# Altium PCB LED.PcbDoc (part 2 of 2)
Units mil, origin at the board's own origin, x right, y up, seen from the top; angles counter-clockwise.
Board outline 7000 x 7000 mil, 2 copper layers (Top Layer, Bottom Layer); 226 components, 111 nets, 676 pads, 222 vias.
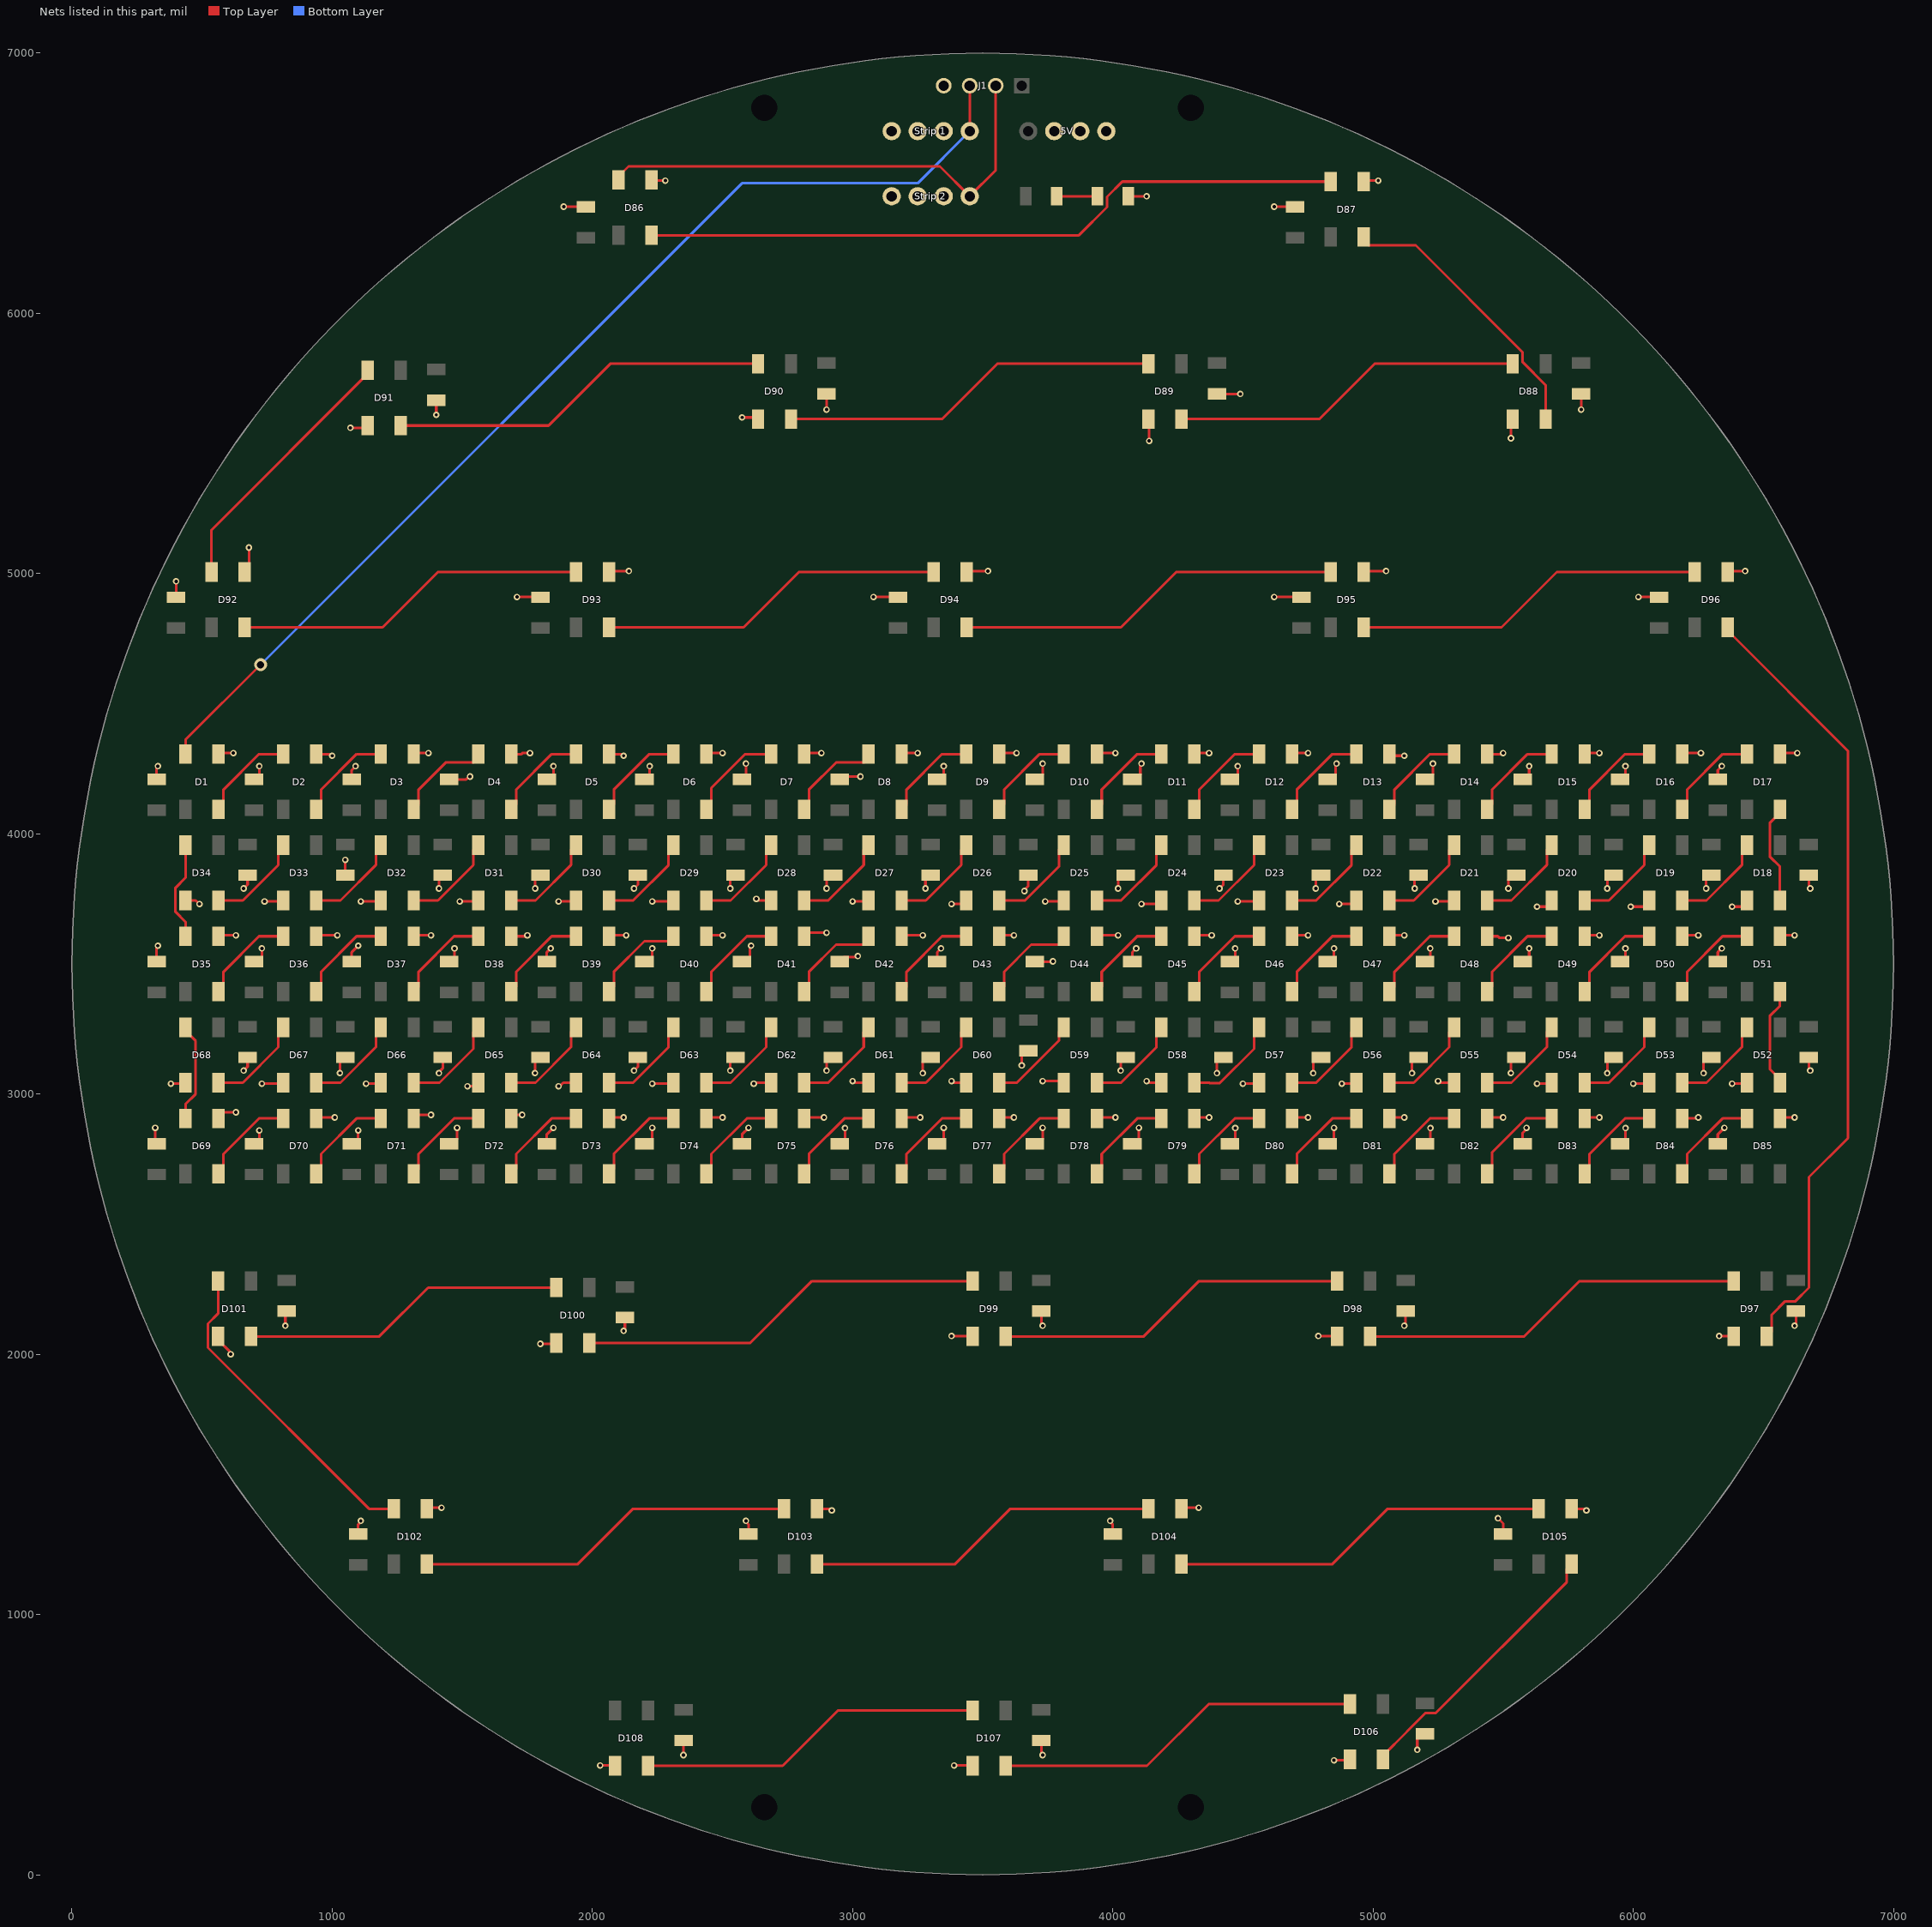
[diagram p2: the nets of this part, all layers, seen from the top]

## Via types
v1: diameter 25, hole 13, Top Layer to Bottom Layer, 217 vias
v2: diameter 59.06, hole 59.06, Top Layer to Bottom Layer, 4 vias
v3: diameter 50, hole 28, Top Layer to Bottom Layer, 1 vias

## Nets (pads, with @x,y where several pads share a name; then routed paths per layer and width w, separated by ;. In a path a pad name is that pad's centre, name@x,y a point inside that pad or via, vN(x,y) a via of type N, cw(c..) or ccw(c..) an arc to the next point about the centre after c; other vN are vias at no path point) (continued)
GND: 5V.2 "Strip 1.2" "Strip 2.2" C1.1 C2.1 C3.1 C4.1 C5.1 C6.1 C7.1 C8.1 C9.1 C10.1 C11.1 C12.1 C13.1 C14.1 C15.1 C16.1 C17.1 C18.1 C19.1 C20.1 C21.1 C22.1 C23.1 C24.1 C25.1 C26.1 C27.1 C28.1 C29.1 C30.1 C31.1 C32.1 C33.1 C34.1 C35.1 C36.1 C37.1 C38.1 C39.1 C40.1 C41.1 C42.1 C43.1 C44.1 C45.1 C46.1 C47.1 C48.1 C49.1 C50.1 C51.1 C52.1 C53.1 C54.1 C55.1 C56.1 C57.1 C58.1 C59.1 C60.1 C61.1 C62.1 C63.1 C64.1 C65.1 C66.1 C67.1 C68.1 C69.1 C70.1 C71.1 C72.1 C73.1 C74.1 C75.1 C76.1 C77.1 C78.1 C79.1 C80.1 C81.1 C82.1 C83.1 C84.1 C85.1 C86.1 C87.1 C88.1 C89.1 C90.1 C91.1 C92.1 C93.1 C94.1 C95.1 C96.1 C97.1 C98.1 C99.1 C100.1 C101.1 C102.1 C103.1 C104.1 C105.1 C106.1 C107.1 C108.1 D1.3 D2.3 D3.3 D4.3 D5.3 D6.3 D7.3 D8.3 D9.3 D10.3 D11.3 D12.3 D13.3 D14.3 D15.3 D16.3 D17.3 D18.3 D19.3 D20.3 D21.3 D22.3 D23.3 D24.3 D25.3 D26.3 D27.3 D28.3 D29.3 D30.3 D31.3 D32.3 D33.3 D34.3 D35.3 D36.3 D37.3 D38.3 D39.3 D40.3 D41.3 D42.3 D43.3 D44.3 D45.3 D46.3 D47.3 D48.3 D49.3 D50.3 D51.3 D52.3 D53.3 D54.3 D55.3 D56.3 D57.3 D58.3 D59.3 D60.3 D61.3 D62.3 D63.3 D64.3 D65.3 D66.3 D67.3 D68.3 D69.3 D70.3 D71.3 D72.3 D73.3 D74.3 D75.3 D76.3 D77.3 D78.3 D79.3 D80.3 D81.3 D82.3 D83.3 D84.3 D85.3 D86.3 D87.3 D88.3 D89.3 D90.3 D91.3 D92.3 D93.3 D94.3 D95.3 D96.3 D97.3 D98.3 D99.3 D100.3 D101.3 D102.3 D103.3 D104.3 D105.3 D106.3 D107.3 D108.3 J1.04 LED1.2 | length 14720.2
  Top Layer w10: v1(320,2870) 320,2814 C69.1@325,2809 ; C35.1@325,3509 325,3560.94 330,3565.94 v1(330,3570) ; C1.1@325,4209 325,4250.94 330,4255.94 v1(330,4260) ; v1(380,3040) 432.8,3040 D68.3@436.5,3043.7 ; C92.1@400,4909 v1(400,4970) ; D34.3@436.5,3743.7 475.25,3743.7 488.95,3730 v1(490,3730) ; D101.3@561.5,2068.7 561.5,2055.05 607.13,2009.42 607.13,2002.87 v1(610,2000) ; D69.3@563.5,2906.3 563.5,2911.25 582.25,2930 v1(630,2930) ; D35.3@563.5,3606.3 567.2,3610 v1(630,3610) ; D1.3@563.5,4306.3 567.2,4310 v1(620,4310) ; v1(660,3090) 675,3105 C68.1@675,3141 ; v1(660,3790) 675,3805 C34.1@675,3841 ; D92.3@663.5,5006.3 680,5022.8 v1(680,5100) ; C70.1@700,2809 703,2809 720,2826 v1(720,2860) ; C36.1@700,3509 713,3509 730,3526 v1(730,3560) ; C2.1@700,4209 703,4209 720,4226 v1(720,4260) ; v1(730,3040) 807.8,3040 D67.3@811.5,3043.7 ; v1(740,3740) 807.8,3740 D33.3@811.5,3743.7 ; v1(820,2110) 820,2161 C101.1@825,2166 ; D70.3@938.5,2906.3 942.2,2910 v1(1010,2910) ; D36.3@938.5,3606.3 942.2,3610 v1(1020,3610) ; D2.3@938.5,4306.3 989.64,4306.3 995.94,4300 v1(1000,4300) ; v1(1029.41,3080.59) 1029.41,3124 1046.41,3141 C67.1@1050,3141 ; C33.1@1050,3841 v1(1050,3900) ; v1(1070,5560) 1127.8,5560 D91.3@1136.5,5568.7 ; C71.1@1075,2809 1083,2809 1100,2826 v1(1100,2860) ; C37.1@1075,3509 1075,3545 v1(1100,3570) ; C3.1@1075,4209 1075,4245 v1(1090,4260) ; C102.1@1100,1309 1100,1346 1110,1356 v1(1110,1360) ; v1(1110,3740) 1182.8,3740 D32.3@1186.5,3743.7 ; v1(1130,3040) 1182.8,3040 D66.3@1186.5,3043.7 ; D71.3@1313.5,2906.3 1327.2,2920 v1(1380,2920) ; D37.3@1313.5,3606.3 1317.2,3610 v1(1380,3610) ; D3.3@1313.5,4306.3 1317.2,4310 v1(1370,4310) ; D102.3@1363.5,1406.3 1367.2,1410 v1(1420,1410) ; v1(1400,5610) C91.1@1400,5666 ; v1(1410,3080) 1410,3084.06 1425,3099.06 C66.1@1425,3141 ; v1(1410,3790) 1410,3826 C32.1@1425,3841 ; C72.1@1450,2809 1463,2809 1480,2826 v1(1480,2870) ; C38.1@1450,3509 1453,3509 1470,3526 v1(1470,3560) ; C4.1@1450,4209 1514.94,4209 1525.94,4220 v1(1530,4220) ; v1(1490,3740) 1557.8,3740 D31.3@1561.5,3743.7 ; v1(1520,3030) 1547.8,3030 D65.3@1561.5,3043.7 ; D72.3@1688.5,2906.3 1702.2,2920 v1(1730,2920) ; D38.3@1688.5,3606.3 1742.24,3606.3 1745.94,3610 v1(1750,3610) ; D4.3@1688.5,4306.3 1727.5,4306.3 1731.2,4310 v1(1760,4310) ; v1(1710,4910) 1799,4910 C93.1@1800,4909 ; v1(1779.41,3080.59) 1779.41,3124 1796.41,3141 C65.1@1800,3141 ; v1(1780,3790) 1780,3824 1797,3841 C31.1@1800,3841 ; v1(1800,2040) 1857.8,2040 D100.3@1861.5,2043.7 ; C73.1@1825,2809 1825,2845 v1(1850,2870) ; C39.1@1825,3509 1825,3545 v1(1840,3560) ; C5.1@1825,4209 1833,4209 1850,4226 v1(1850,4260) ; v1(1870,3030) 1874.06,3030 1887.76,3043.7 D64.3@1936.5,3043.7 ; v1(1870,3740) 1932.8,3740 D30.3@1936.5,3743.7 ; v1(1890,6410) 1974,6410 C86.1@1975,6409 ; v1(2030,420) 2085.2,420 D108.3@2086.5,418.7 ; D73.3@2063.5,2906.3 2067.2,2910 v1(2120,2910) ; D39.3@2063.5,3606.3 2067.2,3610 v1(2130,3610) ; D5.3@2063.5,4306.3 2109.64,4306.3 2115.94,4300 v1(2120,4300) ; D93.3@2063.5,5006.3 2067.2,5010 v1(2140,5010) ; v1(2120,2090) 2120,2094.06 2125,2099.06 C100.1@2125,2141 ; v1(2160,3090) 2175,3105 C64.1@2175,3141 ; v1(2160,3790) 2175,3805 C30.1@2175,3841 ; C74.1@2200,2809 2213,2809 2230,2826 v1(2230,2870) v1@2230.5,2870.5 ; C40.1@2200,3509 2213,3509 2230,3526 v1(2230,3560) ; C6.1@2200,4209 2203,4209 2220,4226 v1(2220,4260) ; D86.3@2227,6512.6 2229.6,6510 v1(2280,6510) ; v1(2230,3040) 2307.8,3040 D63.3@2311.5,3043.7 ; v1(2230,3740) 2307.8,3740 D29.3@2311.5,3743.7 ; v1(2350,460) C108.1@2350,516 ; D74.3@2438.5,2906.3 2442.2,2910 v1(2500,2910) ; D40.3@2438.5,3606.3 2442.2,3610 v1(2500,3610) ; D6.3@2438.5,4306.3 2442.2,4310 v1(2500,4310) ; v1(2530,3090) 2530,3124 2547,3141 C63.1@2550,3141 ; v1(2530,3790) 2530,3824 2547,3841 C29.1@2550,3841 ; C75.1@2575,2809 2575,2845 v1(2600,2870) ; C41.1@2575,3509 2588.5,3509 2605.5,3526 2605.5,3561.44 2610,3565.94 v1(2610,3570) ; C7.1@2575,4209 2590,4224 v1(2590,4270) ; v1(2575,5600) 2630.2,5600 D90.3@2636.5,5593.7 ; v1(2590,1360) 2590,1356 2600,1346 C103.1@2600,1309 ; v1(2620,3040) 2624.06,3040 2627.76,3043.7 D62.3@2686.5,3043.7 ; v1(2630,3750) 2634.06,3750 2640.36,3743.7 D28.3@2686.5,3743.7 ; D75.3@2813.5,2906.3 2817.2,2910 v1(2890,2910) ; D41.3@2813.5,3606.3 2827.2,3620 v1(2900,3620) ; D7.3@2813.5,4306.3 2817.2,4310 v1(2880,4310) ; D103.3@2863.5,1406.3 2909.64,1406.3 2915.94,1400 v1(2920,1400) ; v1(2900,3090) 2900,3124 2917,3141 C62.1@2925,3141 ; v1(2900,3790) 2900,3824 2917,3841 C28.1@2925,3841 ; v1(2900,5630) C90.1@2900,5691 ; C76.1@2950,2809 2953.59,2809 2970.59,2826 v1(2970.59,2869.41) ; C42.1@2950,3509 2967,3526 3011.94,3526 3015.94,3530 v1(3020,3530) ; C8.1@2950,4209 2961,4220 v1(3030,4220) ; v1(3000,3050) 3004.06,3050 3010.36,3043.7 D61.3@3061.5,3043.7 ; v1(3000,3740) 3057.8,3740 D27.3@3061.5,3743.7 ; v1(3080,4910) 3174,4910 C94.1@3175,4909 ; D76.3@3188.5,2906.3 3192.2,2910 v1(3260,2910) ; D42.3@3188.5,3606.3 3192.2,3610 v1(3270,3610) ; D8.3@3188.5,4306.3 3192.2,4310 v1(3250,4310) ; v1(3270,3080) 3270,3124 3287,3141 C61.1@3300,3141 ; v1(3280,3790) 3280,3824 3297,3841 C27.1@3300,3841 ; C77.1@3325,2809 3333,2809 3350,2826 v1(3350,2870) ; C43.1@3325,3509 3325,3545 v1(3340,3560) ; C9.1@3325,4209 3333,4209 3350,4226 v1(3350,4260) ; v1(3380,2070) 3460.2,2070 D99.3@3461.5,2068.7 ; v1(3380,3050) 3384.06,3050 3390.36,3043.7 D60.3@3436.5,3043.7 ; v1(3380,3730) 3422.8,3730 D26.3@3436.5,3743.7 ; v1(3390,420) 3460.2,420 D107.3@3461.5,418.7 ; D94.3@3438.5,5006.3 3442.2,5010 v1(3520,5010) ; D77.3@3563.5,2906.3 3567.2,2910 v1(3620,2910) ; D43.3@3563.5,3606.3 3567.2,3610 v1(3620,3610) ; D9.3@3563.5,4306.3 3567.2,4310 v1(3630,4310) ; v1(3650,3110) 3650,3149 3667,3166 C60.1@3675,3166 ; v1(3660,3780) 3660,3784.06 3675,3799.06 C26.1@3675,3841 ; C78.1@3700,2809 3703,2809 3720,2826 3730,2826 v1(3730,2870) ; C44.1@3700,3509 3769,3509 v1(3770,3510) ; C10.1@3700,4209 3713,4209 3730,4226 v1(3730,4270) ; C107.1@3725,516 3725,469.06 3730,464.06 v1(3730,460) ; C99.1@3725,2166 3725,2119.06 3730,2114.06 v1(3730,2110) ; v1(3730,3050) 3805.2,3050 D59.3@3811.5,3043.7 ; v1(3740,3740) 3807.8,3740 D25.3@3811.5,3743.7 ; D78.3@3938.5,2906.3 3942.2,2910 v1(4010,2910) ; D44.3@3938.5,3606.3 3942.2,3610 v1(4020,3610) ; D10.3@3938.5,4306.3 3942.2,4310 v1(4010,4310) ; v1(3990,1360) 3990,1356 4000,1346 C104.1@4000,1309 ; v1(4020,3790) 4020,3824 4037,3841 C25.1@4050,3841 ; v1(4030,3090) 4030,3124 4047,3141 C59.1@4050,3141 ; LED1.2@4059,6450 v1(4130,6450) ; C79.1@4075,2809 4083,2809 4100,2826 v1(4100,2870) ; C45.1@4075,3509 4075,3545 v1(4090,3560) ; C11.1@4075,4209 4088.5,4209 4105.5,4226 4105.5,4261.44 4110,4265.94 v1(4110,4270) ; v1(4110,3730) 4172.8,3730 D24.3@4186.5,3743.7 ; v1(4130,3050) 4134.06,3050 4140.36,3043.7 D58.3@4186.5,3043.7 ; D89.3@4136.5,5593.7 4140,5590.2 v1(4140,5510) ; D104.3@4263.5,1406.3 4267.2,1410 v1(4330,1410) ; D79.3@4313.5,2906.3 4317.2,2910 v1(4370,2910) ; D45.3@4313.5,3606.3 4317.2,3610 v1(4380,3610) ; D11.3@4313.5,4306.3 4317.2,4310 v1(4370,4310) ; v1(4400,3080) 4400,3124 4417,3141 C58.1@4425,3141 ; C89.1@4400,5691 4401,5690 v1(4490,5690) ; v1(4410,3790) 4425,3805 C24.1@4425,3841 ; C80.1@4450,2809 4453.59,2809 4470.59,2826 v1(4470.59,2869.41) ; C46.1@4450,3509 4453,3509 4470,3526 v1(4470,3560) ; C12.1@4450,4209 4463,4209 4480,4226 v1(4480,4260) ; v1(4480,3740) 4557.8,3740 D23.3@4561.5,3743.7 ; v1(4500,3040) 4557.8,3040 D57.3@4561.5,3043.7 ; v1(4620,4910) 4724,4910 C95.1@4725,4909 ; v1(4620,6410) 4699,6410 C87.1@4700,6409 ; D80.3@4688.5,2906.3 4692.2,2910 v1(4750,2910) ; D46.3@4688.5,3606.3 4692.2,3610 v1(4750,3610) ; D12.3@4688.5,4306.3 4692.2,4310 v1(4750,4310) ; v1(4770,3080) 4770,3124 4787,3141 C57.1@4800,3141 ; v1(4780,3790) 4780,3824 4797,3841 C23.1@4800,3841 ; v1(4790,2070) 4860.2,2070 D98.3@4861.5,2068.7 ; C81.1@4825,2809 4833,2809 4850,2826 v1(4850,2870) ; C47.1@4825,3509 4833,3509 4850,3526 v1(4850,3560) ; C13.1@4825,4209 4838.5,4209 4855.5,4226 4855.5,4261.44 4860,4265.94 v1(4860,4270) ; v1(4850,440) 4907.8,440 D106.3@4911.5,443.7 ; v1(4870,3730) 4922.8,3730 D22.3@4936.5,3743.7 ; v1(4880,3040) 4932.8,3040 D56.3@4936.5,3043.7 ; D95.3@4963.5,5006.3 4967.2,5010 v1(5050,5010) ; D87.3@4963.5,6506.3 4967.2,6510 v1(5020,6510) ; D81.3@5063.5,2906.3 5067.2,2910 v1(5120,2910) ; D47.3@5063.5,3606.3 5067.2,3610 v1(5120,3610) ; D13.3@5063.5,4306.3 5069.8,4300 v1(5120,4300) ; v1(5120,2110) 5120,2114.06 5125,2119.06 C98.1@5125,2166 ; v1(5150,3080) 5150,3124 5167,3141 C56.1@5175,3141 ; v1(5160,3790) 5160,3826 C22.1@5175,3841 ; v1(5170,480) 5170,524 5187,541 C106.1@5200,541 ; C82.1@5200,2809 5203.59,2809 5220.59,2826 v1(5220.59,2869.41) ; C48.1@5200,3509 5203,3509 5220,3526 v1(5220,3560) ; C14.1@5200,4209 5213,4209 5230,4226 v1(5230,4270) ; v1(5240,3740) 5307.8,3740 D21.3@5311.5,3743.7 ; v1(5250,3050) 5254.06,3050 5260.36,3043.7 D55.3@5311.5,3043.7 ; D82.3@5438.5,2906.3 5442.2,2910 v1(5500,2910) ; D48.3@5438.5,3606.3 5479.64,3606.3 5485.94,3600 v1(5520,3600) ; D14.3@5438.5,4306.3 5492.24,4306.3 5495.94,4310 v1(5500,4310) ; v1(5480,1370) 5500,1350 C105.1@5500,1309 ; v1(5520,3790) 5520,3824 5537,3841 C21.1@5550,3841 ; v1(5529.41,3080.59) 5529.41,3124 5546.41,3141 C55.1@5550,3141 ; v1(5530,5520) 5530,5587.2 D88.3@5536.5,5593.7 ; C83.1@5575,2809 5575,2850.94 5590,2865.94 v1(5590,2870) ; C49.1@5575,3509 5583,3509 5600,3526 v1(5600,3560) ; C15.1@5575,4209 5583,4209 5600,4226 v1(5600,4260) ; v1(5630,3040) 5682.8,3040 D54.3@5686.5,3043.7 ; v1(5630,3720) 5667.75,3720 5686.5,3738.75 D20.3@5686.5,3743.7 ; D105.3@5763.5,1406.3 5809.64,1406.3 5815.94,1400 v1(5820,1400) ; v1(5800,5630) C88.1@5800,5691 ; D83.3@5813.5,2906.3 5817.2,2910 v1(5870,2910) ; D49.3@5813.5,3606.3 5817.2,3610 v1(5870,3610) ; D15.3@5813.5,4306.3 5817.2,4310 v1(5870,4310) ; v1(5900,3080) 5900,3124 5917,3141 C54.1@5925,3141 ; v1(5900,3790) 5900,3824 5917,3841 C20.1@5925,3841 ; C84.1@5950,2809 5953.59,2809 5970.59,2826 v1(5970.59,2869.41) ; C50.1@5950,3509 5953,3509 5970,3526 v1(5970,3560) ; C16.1@5950,4209 5953,4209 5970,4226 v1(5970,4260) ; v1(5990,3720) 6042.75,3720 6061.5,3738.75 D19.3@6061.5,3743.7 ; v1(6000,3040) 6057.8,3040 D53.3@6061.5,3043.7 ; v1(6020,4910) 6099,4910 C96.1@6100,4909 ; D84.3@6188.5,2906.3 6242.24,2906.3 6245.94,2910 v1(6250,2910) ; D50.3@6188.5,3606.3 6192.2,3610 v1(6250,3610) ; D16.3@6188.5,4306.3 6192.2,4310 v1(6260,4310) ; v1(6270,3080) 6270,3124 6287,3141 C53.1@6300,3141 ; v1(6280,3790) 6280,3824 6297,3841 C19.1@6300,3841 ; C85.1@6325,2809 6325,2845 v1(6350,2870) ; C51.1@6325,3509 6325,3545 v1(6340,3560) ; C17.1@6325,4209 6325,4245 v1(6340,4260) ; v1(6330,2070) 6385.2,2070 D97.3@6386.5,2068.7 ; D96.3@6363.5,5006.3 6367.2,5010 v1(6430,5010) ; v1(6380,3040) 6432.8,3040 D52.3@6436.5,3043.7 ; v1(6380,3720) 6417.75,3720 6436.5,3738.75 D18.3@6436.5,3743.7 ; D85.3@6563.5,2906.3 6567.2,2910 v1(6620,2910) ; D51.3@6563.5,3606.3 6567.2,3610 v1(6620,3610) ; D17.3@6563.5,4306.3 6567.2,4310 v1(6630,4310) ; v1(6620,2110) 6620,2114.06 6625,2119.06 C97.1@6625,2166 ; C52.1@6675,3141 6675,3099.06 6680,3094.06 v1(6680,3090) ; C18.1@6675,3841 6675,3799.06 6680,3794.06 v1(6680,3790)
NetD1_2: D1.2 D2.4 | length 369.8
  Top Layer w10: D1.2@563.5,4093.7 582.25,4112.45 582.25,4169.96 718.59,4306.3 D2.4@811.5,4306.3
NetD1_4: "Strip 1.1" D1.4 J1.03 | length 4212.3
  Top Layer w10: D1.4@436.5,4306.3 436.5,4361.5 v3(725,4650) ; 3450,6700 J1.03@3450,6875
  Bottom Layer w10: v3(725,4650) 2575,6500 3250,6500 3450,6700
NetD2_2: D2.2 D3.4 | length 369.8
  Top Layer w10: D2.2@938.5,4093.7 957.25,4112.45 957.25,4169.96 1093.59,4306.3 D3.4@1186.5,4306.3
NetD3_2: D3.2 D4.4 | length 377.7
  Top Layer w10: D3.2@1313.5,4093.7 1332.25,4112.45 1332.25,4169.96 1436.19,4273.9 1542.75,4273.9 1561.5,4292.65 D4.4@1561.5,4306.3
NetD4_2: D4.2 D5.4 | length 369.8
  Top Layer w10: D4.2@1688.5,4093.7 1707.25,4112.45 1707.25,4169.96 1843.59,4306.3 D5.4@1936.5,4306.3
NetD5_2: D5.2 D6.4 | length 369.8
  Top Layer w10: D5.2@2063.5,4093.7 2082.25,4112.45 2082.25,4169.96 2218.59,4306.3 D6.4@2311.5,4306.3
NetD6_2: D6.2 D7.4 | length 373.4
  Top Layer w10: D6.2@2438.5,4093.7 2457.25,4112.45 2457.25,4176.14 2587.41,4306.3 D7.4@2686.5,4306.3
NetD7_2: D7.2 D8.4 | length 377.7
  Top Layer w10: D7.2@2813.5,4093.7 2832.25,4112.45 2832.25,4169.96 2936.19,4273.9 3042.75,4273.9 3061.5,4292.65 D8.4@3061.5,4306.3
NetD8_2: D8.2 D9.4 | length 369.8
  Top Layer w10: D8.2@3188.5,4093.7 3207.25,4112.45 3207.25,4169.96 3343.59,4306.3 D9.4@3436.5,4306.3
NetD9_2: D9.2 D10.4 | length 369.8
  Top Layer w10: D9.2@3563.5,4093.7 3582.25,4112.45 3582.25,4169.96 3718.59,4306.3 D10.4@3811.5,4306.3
NetD10_2: D10.2 D11.4 | length 369.8
  Top Layer w10: D10.2@3938.5,4093.7 3957.25,4112.45 3957.25,4169.96 4093.59,4306.3 D11.4@4186.5,4306.3
NetD11_2: D11.2 D12.4 | length 369.8
  Top Layer w10: D11.2@4313.5,4093.7 4332.25,4112.45 4332.25,4169.96 4468.59,4306.3 D12.4@4561.5,4306.3
NetD12_2: D12.2 D13.4 | length 369.8
  Top Layer w10: D12.2@4688.5,4093.7 4707.25,4112.45 4707.25,4169.96 4843.59,4306.3 D13.4@4936.5,4306.3
NetD13_2: D13.2 D14.4 | length 369.8
  Top Layer w10: D13.2@5063.5,4093.7 5082.25,4112.45 5082.25,4169.96 5218.59,4306.3 D14.4@5311.5,4306.3
NetD14_2: D14.2 D15.4 | length 369.8
  Top Layer w10: D14.2@5438.5,4093.7 5457.25,4112.45 5457.25,4169.96 5593.59,4306.3 D15.4@5686.5,4306.3
NetD15_2: D15.2 D16.4 | length 369.8
  Top Layer w10: D15.2@5813.5,4093.7 5832.25,4112.45 5832.25,4169.96 5968.59,4306.3 D16.4@6061.5,4306.3
NetD16_2: D16.2 D17.4 | length 369.8
  Top Layer w10: D16.2@6188.5,4093.7 6207.25,4112.45 6207.25,4169.96 6343.59,4306.3 D17.4@6436.5,4306.3
NetD17_2: D17.2 D18.4 | length 382.1
  Top Layer w10: D18.4@6563.5,3743.7 6563.5,3873.94 6524.75,3912.69 6524.75,4041.3 6563.5,4080.05 D17.2@6563.5,4093.7
NetD18_2: D18.2 D19.4 | length 369.8
  Top Layer w10: D19.4@6188.5,3743.7 6281.41,3743.7 6417.75,3880.04 6417.75,3937.55 D18.2@6436.5,3956.3
NetD19_2: D19.2 D20.4 | length 369.8
  Top Layer w10: D20.4@5813.5,3743.7 5906.41,3743.7 6042.75,3880.04 6042.75,3937.55 D19.2@6061.5,3956.3
NetD20_2: D20.2 D21.4 | length 369.8
  Top Layer w10: D21.4@5438.5,3743.7 5531.41,3743.7 5667.75,3880.04 5667.75,3937.55 D20.2@5686.5,3956.3
NetD21_2: D21.2 D22.4 | length 369.8
  Top Layer w10: D22.4@5063.5,3743.7 5156.41,3743.7 5292.75,3880.04 5292.75,3937.55 D21.2@5311.5,3956.3
NetD22_2: D22.2 D23.4 | length 369.8
  Top Layer w10: D23.4@4688.5,3743.7 4781.41,3743.7 4917.75,3880.04 4917.75,3937.55 D22.2@4936.5,3956.3
NetD23_2: D23.2 D24.4 | length 369.8
  Top Layer w10: D24.4@4313.5,3743.7 4406.41,3743.7 4542.75,3880.04 4542.75,3937.55 D23.2@4561.5,3956.3
NetD24_2: D24.2 D25.4 | length 369.8
  Top Layer w10: D25.4@3938.5,3743.7 4031.41,3743.7 4167.75,3880.04 4167.75,3937.55 D24.2@4186.5,3956.3
NetD25_2: D25.2 D26.4 | length 373.4
  Top Layer w10: D26.4@3563.5,3743.7 3662.59,3743.7 3792.75,3873.86 3792.75,3937.55 D25.2@3811.5,3956.3
NetD26_2: D26.2 D27.4 | length 369.8
  Top Layer w10: D27.4@3188.5,3743.7 3281.41,3743.7 3417.75,3880.04 3417.75,3937.55 D26.2@3436.5,3956.3
NetD27_2: D27.2 D28.4 | length 369.8
  Top Layer w10: D28.4@2813.5,3743.7 2906.41,3743.7 3042.75,3880.04 3042.75,3937.55 D27.2@3061.5,3956.3
NetD28_2: D28.2 D29.4 | length 369.8
  Top Layer w10: D29.4@2438.5,3743.7 2531.41,3743.7 2667.75,3880.04 2667.75,3937.55 D28.2@2686.5,3956.3
NetD29_2: D29.2 D30.4 | length 369.8
  Top Layer w10: D30.4@2063.5,3743.7 2156.41,3743.7 2292.75,3880.04 2292.75,3937.55 D29.2@2311.5,3956.3
NetD30_2: D30.2 D31.4 | length 369.8
  Top Layer w10: D31.4@1688.5,3743.7 1781.41,3743.7 1917.75,3880.04 1917.75,3937.55 D30.2@1936.5,3956.3
NetD31_2: D31.2 D32.4 | length 369.8
  Top Layer w10: D32.4@1313.5,3743.7 1406.41,3743.7 1542.75,3880.04 1542.75,3937.55 D31.2@1561.5,3956.3
NetD32_2: D32.2 D33.4 | length 369.8
  Top Layer w10: D33.4@938.5,3743.7 1031.41,3743.7 1167.75,3880.04 1167.75,3937.55 D32.2@1186.5,3956.3
NetD33_2: D33.2 D34.4 | length 369.8
  Top Layer w10: D34.4@563.5,3743.7 656.41,3743.7 792.75,3880.04 792.75,3937.55 D33.2@811.5,3956.3
NetD34_2: D34.2 D35.4 | length 382.1
  Top Layer w10: D35.4@436.5,3606.3 436.5,3661.34 397.75,3700.09 397.75,3792.62 436.5,3831.37 D34.2@436.5,3956.3
NetD35_2: D35.2 D36.4 | length 369.8
  Top Layer w10: D35.2@563.5,3393.7 582.25,3412.45 582.25,3469.96 718.59,3606.3 D36.4@811.5,3606.3
NetD36_2: D36.2 D37.4 | length 369.8
  Top Layer w10: D36.2@938.5,3393.7 957.25,3412.45 957.25,3469.96 1093.59,3606.3 D37.4@1186.5,3606.3
NetD37_2: D37.2 D38.4 | length 369.8
  Top Layer w10: D37.2@1313.5,3393.7 1332.25,3412.45 1332.25,3469.96 1468.59,3606.3 D38.4@1561.5,3606.3
NetD38_2: D38.2 D39.4 | length 369.8
  Top Layer w10: D38.2@1688.5,3393.7 1707.25,3412.45 1707.25,3469.96 1843.59,3606.3 D39.4@1936.5,3606.3
NetD39_2: D39.2 D40.4 | length 369.8
  Top Layer w10: D39.2@2063.5,3393.7 2082.25,3412.45 2082.25,3469.96 2199.79,3587.5 2292.75,3587.5 2311.5,3606.25 D40.4@2311.5,3606.3
NetD40_2: D40.2 D41.4 | length 369.8
  Top Layer w10: D40.2@2438.5,3393.7 2457.25,3412.45 2457.25,3469.96 2593.59,3606.3 D41.4@2686.5,3606.3
NetD41_2: D41.2 D42.4 | length 377.7
  Top Layer w10: D41.2@2813.5,3393.7 2832.25,3412.45 2832.25,3469.96 2936.19,3573.9 3042.75,3573.9 3061.5,3592.65 D42.4@3061.5,3606.3
NetD42_2: D42.2 D43.4 | length 369.8
  Top Layer w10: D42.2@3188.5,3393.7 3207.25,3412.45 3207.25,3469.96 3343.59,3606.3 D43.4@3436.5,3606.3
NetD43_2: D43.2 D44.4 | length 377.7
  Top Layer w10: D43.2@3563.5,3393.7 3582.25,3412.45 3582.25,3469.96 3686.19,3573.9 3792.75,3573.9 3811.5,3592.65 D44.4@3811.5,3606.3
NetD44_2: D44.2 D45.4 | length 369.8
  Top Layer w10: D44.2@3938.5,3393.7 3957.25,3412.45 3957.25,3469.96 4093.59,3606.3 D45.4@4186.5,3606.3
NetD45_2: D45.2 D46.4 | length 369.8
  Top Layer w10: D45.2@4313.5,3393.7 4332.25,3412.45 4332.25,3469.96 4468.59,3606.3 D46.4@4561.5,3606.3
NetD46_2: D46.2 D47.4 | length 369.8
  Top Layer w10: D46.2@4688.5,3393.7 4707.25,3412.45 4707.25,3469.96 4843.59,3606.3 D47.4@4936.5,3606.3
NetD47_2: D47.2 D48.4 | length 369.8
  Top Layer w10: D47.2@5063.5,3393.7 5082.25,3412.45 5082.25,3469.96 5218.59,3606.3 D48.4@5311.5,3606.3
NetD48_2: D48.2 D49.4 | length 369.8
  Top Layer w10: D48.2@5438.5,3393.7 5457.25,3412.45 5457.25,3469.96 5593.59,3606.3 D49.4@5686.5,3606.3
NetD49_2: D49.2 D50.4 | length 369.8
  Top Layer w10: D49.2@5813.5,3393.7 5832.25,3412.45 5832.25,3469.96 5968.59,3606.3 D50.4@6061.5,3606.3
NetD50_2: D50.2 D51.4 | length 369.8
  Top Layer w10: D50.2@6188.5,3393.7 6207.25,3412.45 6207.25,3469.96 6343.59,3606.3 D51.4@6436.5,3606.3
NetD51_2: D51.2 D52.4 | length 382.1
  Top Layer w10: D52.4@6563.5,3043.7 6563.5,3057.35 6524.75,3096.1 6524.75,3299.91 6563.5,3338.66 D51.2@6563.5,3393.7
NetD52_2: D52.2 D53.4 | length 369.8
  Top Layer w10: D53.4@6188.5,3043.7 6281.41,3043.7 6417.75,3180.04 6417.75,3237.55 D52.2@6436.5,3256.3
NetD53_2: D53.2 D54.4 | length 369.8
  Top Layer w10: D54.4@5813.5,3043.7 5906.41,3043.7 6042.75,3180.04 6042.75,3237.55 D53.2@6061.5,3256.3
NetD54_2: D54.2 D55.4 | length 369.8
  Top Layer w10: D55.4@5438.5,3043.7 5531.41,3043.7 5667.75,3180.04 5667.75,3237.55 D54.2@5686.5,3256.3
NetD55_2: D55.2 D56.4 | length 369.8
  Top Layer w10: D56.4@5063.5,3043.7 5156.41,3043.7 5292.75,3180.04 5292.75,3237.55 D55.2@5311.5,3256.3
NetD56_2: D56.2 D57.4 | length 369.8
  Top Layer w10: D57.4@4688.5,3043.7 4781.41,3043.7 4917.75,3180.04 4917.75,3237.55 D56.2@4936.5,3256.3
NetD57_2: D57.2 D58.4 | length 374.4
  Top Layer w10: D58.4@4313.5,3043.7 4371.22,3043.7 4372.42,3042.5 4411.39,3042.5 4542.75,3173.86 4542.75,3237.55 D57.2@4561.5,3256.3
NetD58_2: D58.2 D59.4 | length 369.8
  Top Layer w10: D59.4@3938.5,3043.7 4031.41,3043.7 4167.75,3180.04 4167.75,3237.55 D58.2@4186.5,3256.3
NetD59_2: D59.2 D60.4 | length 355.1
  Top Layer w10: D60.4@3563.5,3043.7 3631.41,3043.7 3792.75,3205.04 3792.75,3237.55 D59.2@3811.5,3256.3
NetD60_2: D60.2 D61.4 | length 369.8
  Top Layer w10: D61.4@3188.5,3043.7 3281.41,3043.7 3417.75,3180.04 3417.75,3237.55 D60.2@3436.5,3256.3
NetD61_2: D61.2 D62.4 | length 369.8
  Top Layer w10: D62.4@2813.5,3043.7 2906.41,3043.7 3042.75,3180.04 3042.75,3237.55 D61.2@3061.5,3256.3
NetD62_2: D62.2 D63.4 | length 369.8
  Top Layer w10: D63.4@2438.5,3043.7 2531.41,3043.7 2667.75,3180.04 2667.75,3237.55 D62.2@2686.5,3256.3
NetD63_2: D63.2 D64.4 | length 369.8
  Top Layer w10: D64.4@2063.5,3043.7 2156.41,3043.7 2292.75,3180.04 2292.75,3237.55 D63.2@2311.5,3256.3
NetD64_2: D64.2 D65.4 | length 369.8
  Top Layer w10: D65.4@1688.5,3043.7 1781.41,3043.7 1917.75,3180.04 1917.75,3237.55 D64.2@1936.5,3256.3
NetD65_2: D65.2 D66.4 | length 373.4
  Top Layer w10: D66.4@1313.5,3043.7 1412.59,3043.7 1542.75,3173.86 1542.75,3237.55 D65.2@1561.5,3256.3
NetD66_2: D66.2 D67.4 | length 369.8
  Top Layer w10: D67.4@938.5,3043.7 1031.41,3043.7 1167.75,3180.04 1167.75,3237.55 D66.2@1186.5,3256.3
NetD67_2: D67.2 D68.4 | length 369.8
  Top Layer w10: D68.4@563.5,3043.7 656.41,3043.7 792.75,3180.04 792.75,3237.55 D67.2@811.5,3256.3
NetD68_2: D68.2 D69.4 | length 382.1
  Top Layer w10: D69.4@436.5,2906.3 436.5,2961.34 475.25,3000.09 475.25,3203.9 436.5,3242.65 D68.2@436.5,3256.3
NetD69_2: D69.2 D70.4 | length 369.8
  Top Layer w10: D69.2@563.5,2693.7 582.25,2712.45 582.25,2769.96 718.59,2906.3 D70.4@811.5,2906.3
NetD70_2: D70.2 D71.4 | length 369.8
  Top Layer w10: D70.2@938.5,2693.7 957.25,2712.45 957.25,2769.96 1093.59,2906.3 D71.4@1186.5,2906.3
NetD71_2: D71.2 D72.4 | length 369.8
  Top Layer w10: D71.2@1313.5,2693.7 1332.25,2712.45 1332.25,2769.96 1468.59,2906.3 D72.4@1561.5,2906.3
NetD72_2: D72.2 D73.4 | length 369.8
  Top Layer w10: D72.2@1688.5,2693.7 1707.25,2712.45 1707.25,2769.96 1843.59,2906.3 D73.4@1936.5,2906.3
NetD73_2: D73.2 D74.4 | length 369.8
  Top Layer w10: D73.2@2063.5,2693.7 2082.25,2712.45 2082.25,2769.96 2218.59,2906.3 D74.4@2311.5,2906.3
NetD74_2: D74.2 D75.4 | length 369.8
  Top Layer w10: D74.2@2438.5,2693.7 2457.25,2712.45 2457.25,2769.96 2593.59,2906.3 D75.4@2686.5,2906.3
NetD75_2: D75.2 D76.4 | length 369.8
  Top Layer w10: D75.2@2813.5,2693.7 2832.25,2712.45 2832.25,2769.96 2968.59,2906.3 D76.4@3061.5,2906.3
NetD76_2: D76.2 D77.4 | length 369.8
  Top Layer w10: D76.2@3188.5,2693.7 3207.25,2712.45 3207.25,2769.96 3343.59,2906.3 D77.4@3436.5,2906.3
NetD77_2: D77.2 D78.4 | length 369.8
  Top Layer w10: D77.2@3563.5,2693.7 3582.25,2712.45 3582.25,2769.96 3718.59,2906.3 D78.4@3811.5,2906.3
NetD78_2: D78.2 D79.4 | length 369.8
  Top Layer w10: D78.2@3938.5,2693.7 3957.25,2712.45 3957.25,2769.96 4093.59,2906.3 D79.4@4186.5,2906.3
NetD79_2: D79.2 D80.4 | length 369.8
  Top Layer w10: D79.2@4313.5,2693.7 4332.25,2712.45 4332.25,2769.96 4468.59,2906.3 D80.4@4561.5,2906.3
NetD80_2: D80.2 D81.4 | length 369.8
  Top Layer w10: D80.2@4688.5,2693.7 4707.25,2712.45 4707.25,2769.96 4843.59,2906.3 D81.4@4936.5,2906.3
NetD81_2: D81.2 D82.4 | length 369.8
  Top Layer w10: D81.2@5063.5,2693.7 5082.25,2712.45 5082.25,2769.96 5218.59,2906.3 D82.4@5311.5,2906.3
NetD82_2: D82.2 D83.4 | length 373.4
  Top Layer w10: D82.2@5438.5,2693.7 5457.25,2712.45 5457.25,2776.14 5587.41,2906.3 D83.4@5686.5,2906.3
NetD83_2: D83.2 D84.4 | length 369.8
  Top Layer w10: D83.2@5813.5,2693.7 5832.25,2712.45 5832.25,2769.96 5968.59,2906.3 D84.4@6061.5,2906.3
NetD84_2: D84.2 D85.4 | length 369.8
  Top Layer w10: D84.2@6188.5,2693.7 6207.25,2712.45 6207.25,2769.96 6343.59,2906.3 D85.4@6436.5,2906.3
NetD86_2: D86.2 D87.4 | length 2718
  Top Layer w10: D86.2@2227,6300 3869.71,6300 3978,6408.29 3978,6447.71 4036.59,6506.3 D87.4@4836.5,6506.3
NetD87_2: D87.2 D88.4 | length 1096.3
  Top Layer w10: D87.2@4963.5,6293.7 4963.5,6280.05 4982.25,6261.3 5163.87,6261.3 5575.25,5849.91 5575.25,5812.19 5663.5,5723.94 D88.4@5663.5,5593.7
NetD88_2: D88.2 D89.4 | length 1361.1
  Top Layer w10: D89.4@4263.5,5593.7 4793.7,5593.7 5006.3,5806.3 D88.2@5536.5,5806.3
NetD89_2: D89.2 D90.4 | length 1461.1
  Top Layer w10: D90.4@2763.5,5593.7 3343.7,5593.7 3556.3,5806.3 D89.2@4136.5,5806.3
NetD90_2: D90.2 D91.4 | length 1471.4
  Top Layer w10: D91.4@1263.5,5568.7 1831.2,5568.7 2068.8,5806.3 D90.2@2636.5,5806.3
NetD91_2: D91.2 D92.4 | length 1023.5
  Top Layer w10: D92.4@536.5,5006.3 536.5,5167.65 1136.5,5767.65 D91.2@1136.5,5781.3
NetD92_2: D92.2 D93.4 | length 1361.1
  Top Layer w10: D92.2@663.5,4793.7 1193.7,4793.7 1406.3,5006.3 D93.4@1936.5,5006.3
NetD93_2: D93.2 D94.4 | length 1336.1
  Top Layer w10: D93.2@2063.5,4793.7 2581.2,4793.7 2793.8,5006.3 D94.4@3311.5,5006.3
NetD94_2: D94.2 D95.4 | length 1486.1
  Top Layer w10: D94.2@3438.5,4793.7 4031.2,4793.7 4243.8,5006.3 D95.4@4836.5,5006.3
NetD95_2: D95.2 D96.4 | length 1361.1
  Top Layer w10: D95.2@4963.5,4793.7 5493.7,4793.7 5706.3,5006.3 D96.4@6236.5,5006.3
NetD96_2: D96.2 D97.4 | length 3068.3
  Top Layer w10: D96.2@6363.5,4793.7 6363.5,4780.05 6825,4318.55 6825,2830.41 6675.5,2680.91 6675.5,2255.79 6623.59,2203.88 6584.16,2203.88 6532.25,2151.96 6532.25,2087.45 D97.4@6513.5,2068.7
NetD97_2: D97.2 D98.4 | length 1486.1
  Top Layer w10: D98.4@4988.5,2068.7 5581.2,2068.7 5793.8,2281.3 D97.2@6386.5,2281.3
NetD98_2: D98.2 D99.4 | length 1361.1
  Top Layer w10: D99.4@3588.5,2068.7 4118.7,2068.7 4331.3,2281.3 D98.2@4861.5,2281.3
NetD99_2: D99.2 D100.4 | length 1571.4
  Top Layer w10: D100.4@1988.5,2043.7 2606.2,2043.7 2843.8,2281.3 D99.2@3461.5,2281.3
NetD100_2: D100.2 D101.4 | length 1250.7
  Top Layer w10: D101.4@688.5,2068.7 1181.2,2068.7 1368.8,2256.3 D100.2@1861.5,2256.3
NetD101_2: D101.2 D102.4 | length 1242.3
  Top Layer w10: D101.2@561.5,2281.3 561.5,2156.37 522.75,2117.62 522.75,2025.09 1141.54,1406.3 D102.4@1236.5,1406.3
NetD102_2: D102.2 D103.4 | length 1461.1
  Top Layer w10: D102.2@1363.5,1193.7 1943.7,1193.7 2156.3,1406.3 D103.4@2736.5,1406.3
NetD103_2: D103.2 D104.4 | length 1361.1
  Top Layer w10: D103.2@2863.5,1193.7 3393.7,1193.7 3606.3,1406.3 D104.4@4136.5,1406.3
NetD104_2: D104.2 D105.4 | length 1461.1
  Top Layer w10: D104.2@4263.5,1193.7 4843.7,1193.7 5056.3,1406.3 D105.4@5636.5,1406.3
NetD105_2: D105.2 D106.4 | length 1073.4
  Top Layer w10: D106.4@5038.5,443.7 5038.5,457.35 5129.77,548.62 5129.77,549.48 5202.29,622 5241.71,622 5744.75,1125.04 5744.75,1174.95 D105.2@5763.5,1193.7
NetD106_2: D106.2 D107.4 | length 1421.4
  Top Layer w10: D107.4@3588.5,418.7 4131.2,418.7 4368.8,656.3 D106.2@4911.5,656.3
NetD107_2: D107.2 D108.4 | length 1336.1
  Top Layer w10: D108.4@2213.5,418.7 2731.2,418.7 2943.8,631.3 D107.2@3461.5,631.3
NetLED1_1: LED1.1 R1.1 | length 157
  Top Layer w10: R1.1@3784,6450 LED1.1@3941,6450
STRIP2: "Strip 2.1" D86.4 J1.02 | length 1893.8
  Top Layer w10: D86.4@2100,6512.6 2100,6526.25 2138.75,6565 3335,6565 3450,6450 3550,6550 J1.02@3550,6875
pads on no net: D85.2 D108.2 H1.1 H2.1 H3.1 H4.1
copper on no net:
  other v2: 5590,830 1370,860 5460,6230 1540,6280

## Polygon pours and split planes (outlines as drawn)
GND on Bottom Layer "GND_L02_P000" (solid, pour order 0): 3426.25,7024.26 4225.74,7024.26 5100,6825 5650,6425 5650,6375 7475,4550 7475,-275 -475,-275 -525,-325 -550,-300 -550,6825

## Keep-outs
Keep-Out Layer:
  the board outline again, w20

## Silkscreen, mask and mechanical layers (free items; w line width, h text height)
Top Overlay:
  lines w10: 200,2575 6750,2575 6750,4425 200,4425 200,2575
  text "John Lettang" at 1950,5432.13 h100
  text "Sunrise Board 1.0" at 1940,5261.76 h100
Mechanical 1:
  circle w20: c3500,3500 r3500